# EAGLE board versao2.0 (EAGLE 5.01)

Size 160 x 100 mm. Coordinates in mm from the lower left corner, seen from the top.
Outline: 0,0 160,0 160,100 0,100 0,0
Copper layers (1*16): Top 0.035mm / dielectric 1.5mm / Bottom 0.035mm
Design rules "default": minimum track width 10mil, minimum drill 24mil, track to track 8mil, track to pad 8mil, pad to pad 8mil, via to via 8mil, smd to smd 8mil, copper to edge 40mil, drill to drill 8mil, minimum pad ring 10mil, minimum via ring 8mil, stop-mask expansion 4mil, vias tented up to drill 0mil, thermal gap 10mil

## Footprints (pad centres in the part's own frame; a part is rotated, then mirrored left to right if it is on the bottom)
ML26 = drill 0.914 octagon: 1 -15.24,-1.27; 2 -15.24,1.27; 3 -12.7,-1.27; 4 -12.7,1.27; 5 -10.16,-1.27; 6 -10.16,1.27; 7 -7.62,-1.27; 8 -7.62,1.27; 9 -5.08,-1.27; 10 -5.08,1.27; 11 -2.54,-1.27; 12 -2.54,1.27; 13 0,-1.27; 14 0,1.27; 15 2.54,-1.27; 16 2.54,1.27; 17 5.08,-1.27; 18 5.08,1.27; 19 7.62,-1.27; 20 7.62,1.27; 21 10.16,-1.27; 22 10.16,1.27; 23 12.7,-1.27; 24 12.7,1.27; 25 15.24,-1.27; 26 15.24,1.27
C5B3 = drill 0.813 pad 1.6 octagon: 1 -2.54,0; 2 2.54,0
C5B2.5 = drill 0.813 pad 1.6 octagon: 1 -2.54,0; 2 2.54,0
P-TSSOP28-1 = smd 0.35 x 1.2: 1 -4.225,-2.975; 2 -3.575,-2.975; 3 -2.925,-2.975; 4 -2.275,-2.975; 5 -1.625,-2.975; 6 -0.975,-2.975; 7 -0.325,-2.975; 8 0.325,-2.975; 9 0.975,-2.975; 10 1.625,-2.975; 11 2.275,-2.975; 12 2.925,-2.975; 13 3.575,-2.975; 14 4.225,-2.975; 15 4.225,2.975; 16 3.575,2.975; 17 2.925,2.975; 18 2.275,2.975; 19 1.625,2.975; 20 0.975,2.975; 21 0.325,2.975; 22 -0.325,2.975; 23 -0.975,2.975; 24 -1.625,2.975; 25 -2.275,2.975; 26 -2.925,2.975; 27 -3.575,2.975; 28 -4.225,2.975
DIL14 = drill 0.813 long: 1 -7.62,-3.81; 2 -5.08,-3.81; 3 -2.54,-3.81; 4 0,-3.81; 5 2.54,-3.81; 6 5.08,-3.81; 7 7.62,-3.81; 8 7.62,3.81; 9 5.08,3.81; 10 2.54,3.81; 11 0,3.81; 12 -2.54,3.81; 13 -5.08,3.81; 14 -7.62,3.81
78XXL = drill 1.016 long: GND 0,-3.81; IN -2.54,-3.81; OUT 2.54,-3.81 | hole 3.302: 0,11.176
JP8Q = drill 0.914 octagon: 1 -8.89,-1.27; 2 -8.89,1.27; 3 -6.35,-1.27; 4 -6.35,1.27; 5 -3.81,-1.27; 6 -3.81,1.27; 7 -1.27,-1.27; 8 -1.27,1.27; 9 1.27,-1.27; 10 1.27,1.27; 11 3.81,-1.27; 12 3.81,1.27; 13 6.35,-1.27; 14 6.35,1.27; 15 8.89,-1.27; 16 8.89,1.27
0204/7 = drill 0.813 octagon: 1 -3.81,0; 2 3.81,0
AK500/4-H = drill 1.321 long: 1 -7.518,0; 2 -2.489,0; 3 2.489,0; 4 7.518,0

## Placement (x,y rotation side)
BUS  [ML26]  13.33,44.92 270 top
C1  10u  [C5B3]  73.02,36.03 0 top
C2  10u  [C5B3]  76.83,50 90 top
C3  47p  [C5B2.5]  121.28,77.94 0 top
C4  47p  [C5B2.5]  121.28,66.51 0 top
C5  47p  [C5B2.5]  121.28,53.81 0 top
C6  47p  [C5B2.5]  121.28,42.38 0 top
C7  47p  [C5B2.5]  121.28,30.95 0 top
C8  47p  [C5B2.5]  121.28,18.25 0 top
C9  47p  [C5B2.5]  121.28,6.82 0 top
C10  47p  [C5B2.5]  -69.22,70.32 0 top  (outside the outline)
C11  0.1u  [C5B3]  -67.95,52.54 0 top  (outside the outline)
C12  0.1u  [C5B3]  -15.88,62.7 0 top  (outside the outline)
C13  0.1u  [C5B3]  -23.5,62.7 0 top  (outside the outline)
C14  0.1u  [C5B3]  -31.12,62.7 0 top  (outside the outline)
C15  10u  [C5B3]  -38.74,62.7 0 top  (outside the outline)
C16  0.1u  [C5B3]  -46.36,62.7 0 top  (outside the outline)
C17  10u  [C5B3]  -53.98,62.7 0 top  (outside the outline)
C18  10u  [C5B3]  80.64,85.56 0 top
C19  0.1u  [C5B3]  -69.22,62.7 0 top  (outside the outline)
IC1  ADS1248G  [P-TSSOP28-1]  66.67,46.19 90 top
IC2  74LS125N  [DIL14]  40,44.92 90 top
IC3  7805  [78XXL]  27.3,81.75 0 top
IC4  7805  [78XXL]  52.7,81.75 0 top
JP1  [JP8Q]  27.3,13.17 90 top
R1  47  [0204/7]  133.98,94.45 0 top
R2  47  [0204/7]  132.71,84.29 0 top
R3  47  [0204/7]  132.71,71.59 0 top
R4  47  [0204/7]  132.71,61.43 0 top
R5  47  [0204/7]  132.71,47.46 0 top
R6  47  [0204/7]  132.71,37.3 0 top
R7  47  [0204/7]  132.71,23.33 0 top
R8  47  [0204/7]  132.71,11.9 0 top
R9  10k  [0204/7]  -37.47,79.21 0 top  (outside the outline)
X1  [AK500/4-H]  149.22,86.83 90 top
X2  [AK500/4-H]  149.22,62.7 90 top
X3  [AK500/4-H]  149.22,38.57 90 top
X4  [AK500/4-H]  149.22,14.44 90 top

## Library data of the parts
BUS = con-harting-ml
C1-C19 = capacitor-wima
IC1 = mylib
IC2 = 74xx-us
IC3 IC4 = v-reg
JP1 = jumper
R1-R9 = resistor
X1-X4 = con-ptr500

## Nets
!SS: BUS.10 IC2.9
+5V: C15.2 C17.1 C18.1 IC1.22 IC2.14 IC3.OUT IC4.OUT
+5V/2: C1.1 IC1.1 R9.2
+12V: BUS.1 BUS.3 C16.1 C19.1 IC3.IN IC4.IN
-12V: BUS.17 BUS.19
ADDR0: BUS.21 JP1.2
ADDR1: BUS.23 JP1.4
ADDR2: BUS.25 JP1.6
ADDR3: BUS.26 JP1.8
ADDR4: BUS.24 JP1.10
ADDR5: BUS.22 JP1.12
ADDR6: BUS.20 JP1.14
ADDR7: BUS.18 JP1.16
AGND: C2.2 C3.2 C4.2 C5.2 C6.2 C7.2 C8.2 C9.2 C10.2 C15.1 C16.2 C17.2 IC1.10 IC1.21 IC4.GND X1.1 X1.3 X2.1 X2.3 X3.1 X3.3 X4.1 X4.3
DGND: C1.2 C18.2 C19.2 IC1.2 IC1.3 IC2.7 IC3.GND
MISO: BUS.14 IC2.11
MOSI: BUS.12 IC2.5
N$1: C2.1 IC1.9
N$2: C10.1 C11.1 IC1.11 R1.1
N$3: C3.1 C11.2 IC1.12 R2.1
N$4: C4.1 C12.1 IC1.17 R3.1
N$5: IC1.28 IC2.3
N$6: C6.1 C13.1 IC1.13 R5.1
N$7: C7.1 C13.2 IC1.14 R6.1
N$8: C8.1 C14.1 IC1.15 R7.1
N$9: C9.1 C14.2 IC1.16 R8.1
N$10: C5.1 C12.2 IC1.18 R4.1
N$11: IC1.27 IC2.6
N$12: IC1.26 IC2.12
N$13: IC1.24 IC2.8 R9.1
N$14: IC2.1 IC2.4 IC2.10 IC2.13 JP1.1 JP1.3 JP1.5 JP1.7 JP1.9 JP1.11 JP1.13 JP1.15
N$18: R1.2 X1.4
N$19: R2.2 X1.2
N$20: R3.2 X2.4
N$21: R4.2 X2.2
N$22: R5.2 X3.4
N$23: R6.2 X3.2
N$24: R7.2 X4.4
N$25: R8.2 X4.2
PE: BUS.11 BUS.13 BUS.15
SCK: BUS.16 IC2.2
V+: BUS.5 BUS.7 BUS.9

## Tracks (layer width: path | path; a pad name or v marks a point on that pad's centre or on a via)
!SS  (1 unrouted)
+5V  (6 unrouted)
+5V/2  (2 unrouted)
+12V  (5 unrouted)
-12V  (1 unrouted)
ADDR0  (1 unrouted)
ADDR1  (1 unrouted)
ADDR2  (1 unrouted)
ADDR3  (1 unrouted)
ADDR4  (1 unrouted)
ADDR5  (1 unrouted)
ADDR6  (1 unrouted)
ADDR7  (1 unrouted)
AGND  (22 unrouted)
DGND  (6 unrouted)
MISO  (1 unrouted)
MOSI  (1 unrouted)
N$1  (1 unrouted)
N$2  (3 unrouted)
N$3  (3 unrouted)
N$4  (3 unrouted)
N$5  (1 unrouted)
N$6  (3 unrouted)
N$7  (3 unrouted)
N$8  (3 unrouted)
N$9  (3 unrouted)
N$10  (3 unrouted)
N$11  (1 unrouted)
N$12  (1 unrouted)
N$13  (2 unrouted)
N$14  (11 unrouted)
N$18  (1 unrouted)
N$19  (1 unrouted)
N$20  (1 unrouted)
N$21  (1 unrouted)
N$22  (1 unrouted)
N$23  (1 unrouted)
N$24  (1 unrouted)
N$25  (1 unrouted)
PE  (2 unrouted)
SCK  (1 unrouted)
V+  (2 unrouted)